# EAGLE board VarredorManual (EAGLE 3.55)
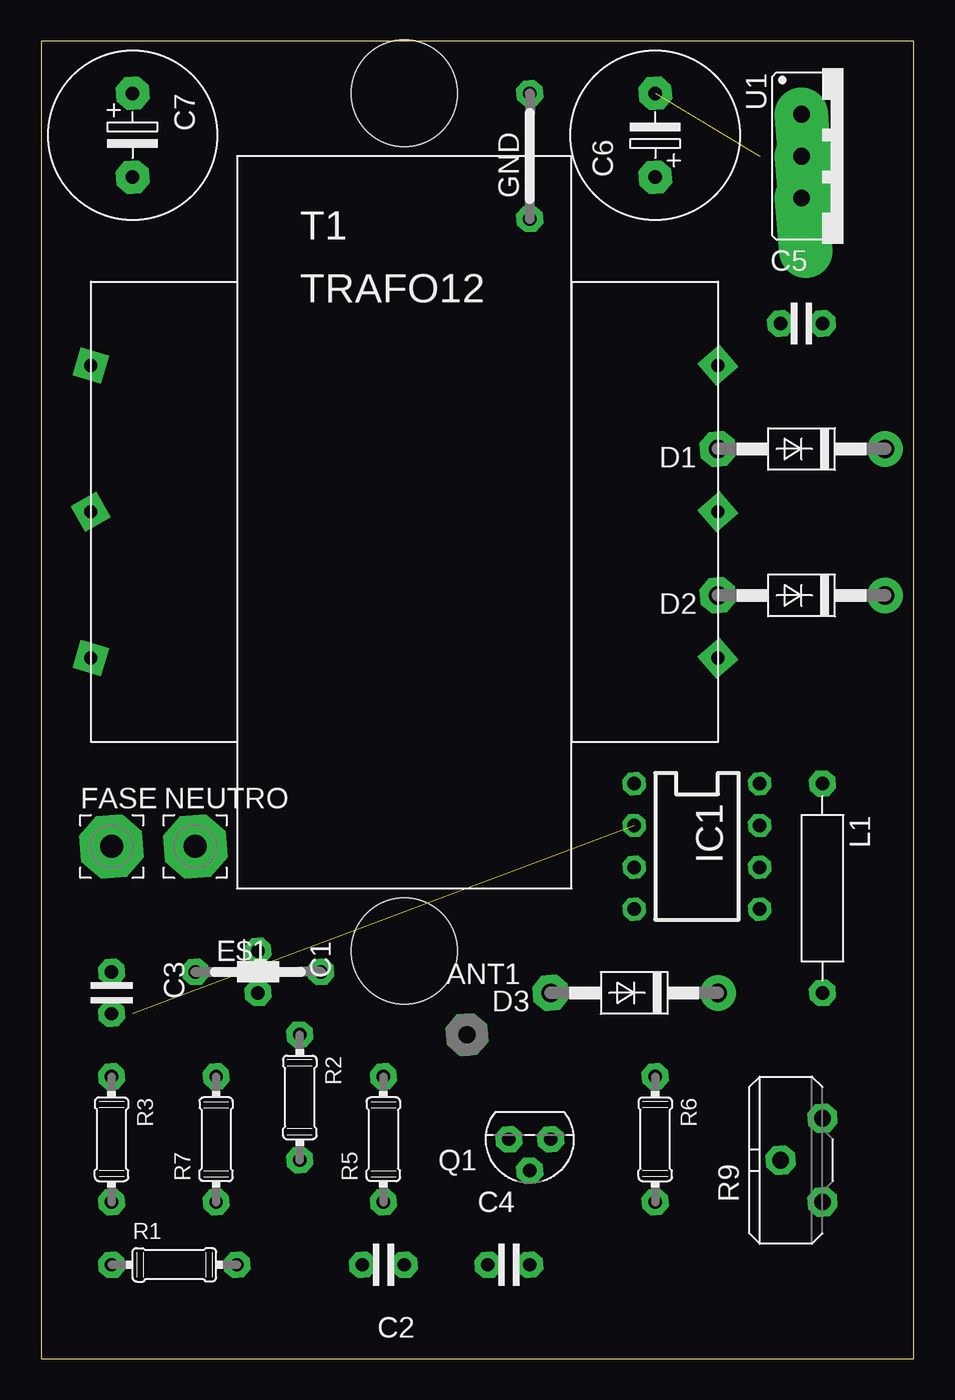
[diagram p0: board, top side]
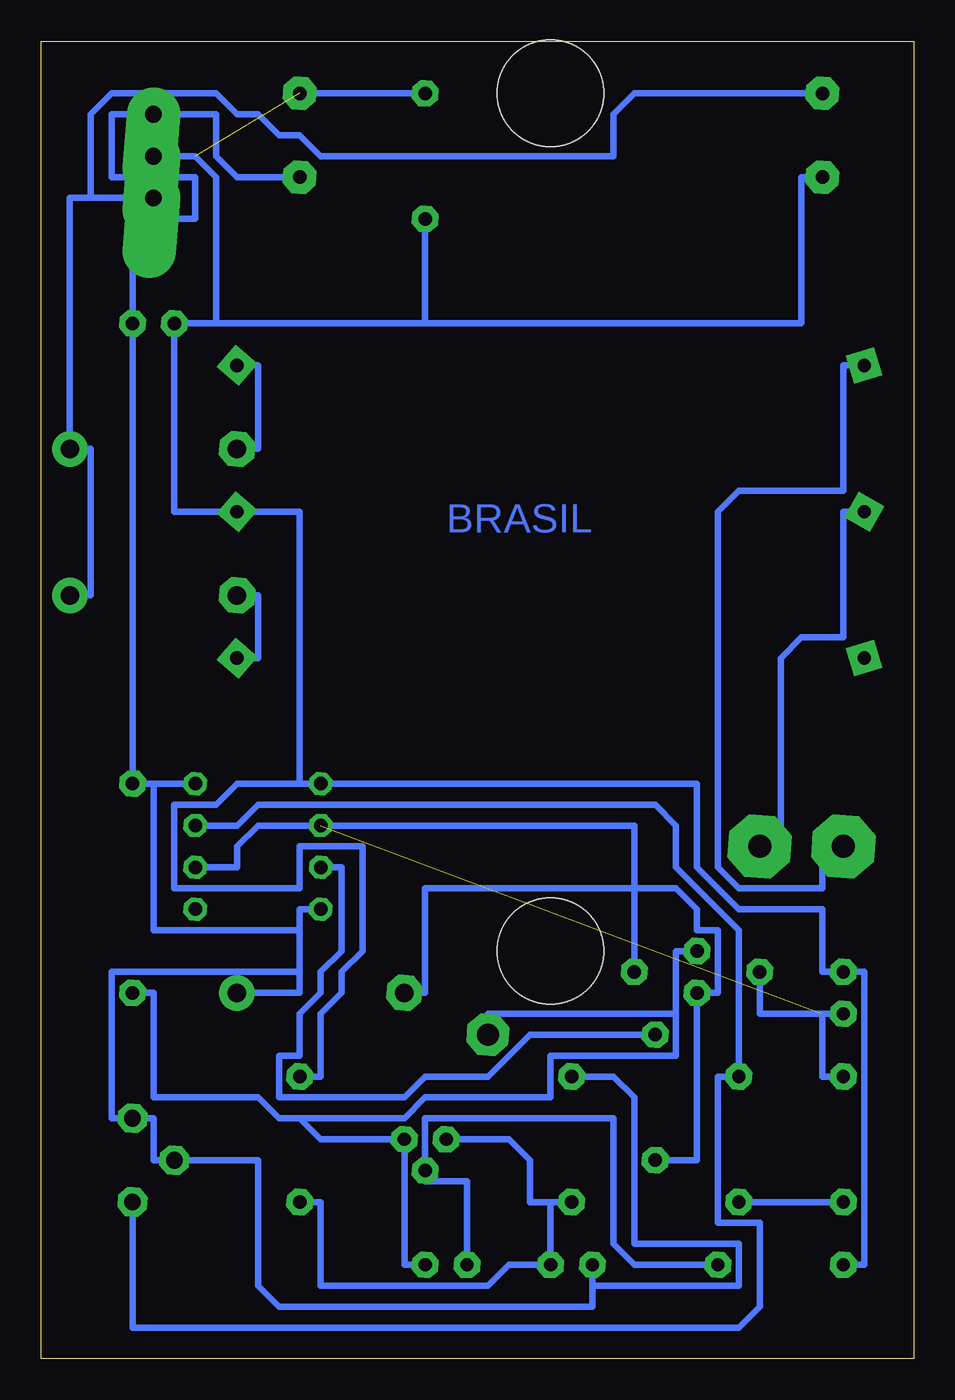
[diagram p1: board, bottom side, seen from below]

Size 53.01 x 80 mm. Coordinates in mm from the lower left corner, seen from the top.
Outline: 0,0 53.01,0 53.01,80 0,80 0,0
Copper layers used: Bottom

## Footprints (pad centres in the part's own frame; a part is rotated, then mirrored left to right if it is on the bottom)
D-01 = drill 1.321 pad 2.54 octagon:  0,0
2,5 = drill 0.813 pad 1.6 octagon:  -1.27,0;  1.27,0
-5 = drill 0.813 pad 2.007 octagon:  -2.54,0;  2.54,0
41-10 = drill 1.118 pad 2.159 octagon:  5.08,0 | drill 1.118 pad 2.159 round:  -5.08,0
 = drill 0.813 pad 1.6 octagon:  -3.81,0;  3.81,0
81/1,4 = drill 1.397 pad 3.81 octagon:  0,0
L8 = drill 0.813 pad 1.397 octagon:  -3.81,-3.81;  -1.27,-3.81;  1.27,-3.81;  3.81,-3.81;  3.81,3.81;  1.27,3.81;  -1.27,3.81;  -3.81,3.81
12,5 = drill 0.813 pad 1.6 octagon:  -6.35,0;  6.35,0
92 = drill 0.813 pad 1.6 octagon:  1.27,0;  0,1.905;  -1.27,0
04/7 = drill 0.813 pad 1.6 octagon:  -3.81,0;  3.81,0
-10S = drill 1.016 pad 1.778 octagon:  -2.54,-1.27;  2.54,-1.27;  0,1.27
AFO500 = drill 0.813 pad 1.778 square: 10 -19.05,8.89; 20 -19.05,-8.89; C-1 19.05,8.89; C-2 19.05,-8.89; RA -19.05,0;  19.05,0 | hole 6.452: 0,25.4; 0,-26.67
220S = drill 1.016 pad 3.251 offset:  -2.54,-2.54;  0,-2.54;  2.54,-2.54

## Placement (x,y rotation side)
ANT1  ANTENA  [D-01]  25.87,19.68 0 top
C1  1nf  [2,5]  13.17,23.49 270 top
C2  4,7pf  [2,5]  20.79,5.71 180 top
C3  47nf  [2,5]  4.28,22.22 270 top
C4  4,7pf  [2,5]  28.41,5.71 0 top
C5  100nf  [2,5]  46.19,62.86 0 top
C6  100uf  [-5]  37.3,74.29 90 top
C7  1000uF  [-5]  5.55,74.29 270 top
D1  1N4004  [41-10]  46.19,55.24 180 top
D2  1N4004  [41-10]  46.19,46.35 180 top
D3  BB809  [41-10]  36.03,22.22 180 top
E$1  []  13.17,23.49 0 top
FASE  [81/1,4]  4.28,31.11 0 top
GND  []  29.68,73.02 90 top
IC1  555  [L8]  39.84,31.11 270 top
L1  [12,5]  47.46,28.57 270 top
NEUTRO  [81/1,4]  9.36,31.11 0 top
Q1  BF494  [92]  29.68,13.33 180 top
R1  220  [04/7]  8.09,5.71 0 top
R2  220k  [04/7]  15.71,15.87 270 top
R3  4k7  [04/7]  4.28,13.33 270 top
R5  10K  [04/7]  20.79,13.33 90 top
R6  5,6K  [04/7]  37.3,13.33 270 top
R7  10k  [04/7]  10.63,13.33 90 top
R9  100k  [-10S]  46.19,12.06 90 top
T1  TRAFO12  [AFO500]  22.06,51.43 0 top
U1  7812T  [220S]  48.73,73.02 270 top

## Library data of the parts
ANT1 C1-C7 L1 R9 = discrete
D1-D3 = diode
E$1 GND = jumper
FASE NEUTRO = wirepad
IC1 = demo
Q1 = npn
R1-R3 R5-R7 = r
T1 = Analogic
U1 = v-reg

## Nets
AC220: T1.20
GND: C3. C5. C6. C7. GND. IC1. R1. R6. T1. U1.
N$1: D1. T1.C-1
N$2: D2. T1.C-2
N$3: C7. D1. D2. U1.
N$5: IC1. R7. R9.
N$6: C4. Q1. R1.
N$7: C2. Q1. R5. R6.
N$8: C1. D3. R2.
N$9: IC1. R2.
N$10: ANT1. C1. C4. L1. Q1.
N$12: R3. R7.
N$13: FASE. T1.10
N$14: C3. E$1. IC1. R3.
N$15: NEUTRO. T1.RA
V+: C2. C5. C6. D3. IC1. L1. R5. R9. U1.

## Tracks (layer width: path | path; a pad name or v marks a point on that pad's centre or on a via)
GND  (1 unrouted)
  Bottom 0.406: 4.28,5.71 3.01,5.71 3.01,23.49 4.28,23.49 5.55,23.49 5.55,27.3 10.63,27.3 13.17,29.84 13.17,34.92 36.03,34.92 37.3,34.92 | 37.3,34.92 37.3,51.43 T1. 44.92,51.43 44.92,62.86 42.38,62.86 | 37.3,17.14 36.03,17.14 36.03,20.95 34.76,22.22 34.76,23.49 33.49,24.76 33.49,31.11 37.3,31.11 37.3,28.57 44.92,28.57 44.92,33.65 42.38,33.65 41.11,34.92 37.3,34.92 | C7. 6.82,71.75 6.82,62.86 29.68,62.86 | 42.38,62.86 29.68,62.86 | 42.38,62.86 42.38,71.75 43.65,73.02 46.19,73.02 | GND. C6. | 29.68,69.21 29.68,62.86
N$1
  Bottom 0.406: T1.C-1 39.84,60.32 39.84,55.24 41.11,55.24
N$2
  Bottom 0.406: T1.C-2 39.84,42.54 39.84,46.35 41.11,46.35
N$3
  Bottom 0.406: D2. 50,46.35 50,55.24 D1. 51.27,70.48 50,70.48 | 5.55,76.83 16.98,76.83 18.25,75.56 18.25,73.02 36.03,73.02 37.3,74.29 38.57,74.29 39.84,75.56 41.11,75.56 42.38,76.83 48.73,76.83 50,75.56 50,70.48 | 50,70.48 U1.
N$5
  Bottom 0.406: 43.65,32.38 41.11,32.38 39.84,33.65 15.71,33.65 14.44,32.38 14.44,29.84 10.63,26.03 R7. 11.9,17.14 11.9,8.25 9.36,8.25 9.36,3.17 10.63,1.9 47.46,1.9 47.46,9.52
N$6
  Bottom 0.406: R1. 16.98,5.71 18.25,6.98 18.25,14.6 29.68,14.6 29.68,11.43 29.68,10.79 27.14,10.79 27.14,5.71
N$7
  Bottom 0.406: 22.06,9.52 22.06,5.71 24.6,5.71 25.87,4.44 36.03,4.44 36.03,9.52 R6. | 22.06,9.52 20.79,9.52 | 28.41,13.33 24.6,13.33 23.33,12.06 23.33,9.52 22.06,9.52
N$8
  Bottom 0.406: R2. 13.17,12.06 C1. 11.9,22.22 11.9,26.03 13.17,26.03 13.17,27.3 14.44,28.57 29.68,28.57 29.68,22.22 30.95,22.22
N$9
  Bottom 0.406: 36.03,29.84 34.76,29.84 34.76,24.76 36.03,23.49 36.03,22.22 37.3,20.95 37.3,18.41 38.57,18.41 38.57,15.87 30.95,15.87 29.68,17.14 25.87,17.14 23.33,19.68 15.71,19.68
N$10
  Bottom 0.406: 13.17,24.76 14.44,24.76 14.44,20.95 | 14.44,20.95 25.87,20.95 ANT1. | C4. 30.95,5.71 Q1. 36.03,13.33 37.3,14.6 | L1. 46.19,22.22 46.19,15.87 39.84,15.87 38.57,14.6 37.3,14.6 | 14.44,20.95 14.44,18.41 22.06,18.41 22.06,15.87 29.68,15.87 30.95,14.6 37.3,14.6
N$12
  Bottom 0.406: R3. 10.63,9.52
N$13
  Bottom 0.406: T1.10 4.28,60.32 4.28,52.7 10.63,52.7 11.9,51.43 11.9,29.84 10.63,28.57 5.55,28.57 5.55,29.84 FASE.
N$14  (1 unrouted)
  Bottom 0.406: 43.65,29.84 41.11,29.84 41.11,31.11 39.84,32.38 36.03,32.38 16.98,32.38 E$1. | 4.28,17.14 5.55,17.14 5.55,20.95 | 5.55,20.95 C3. | 5.55,20.95 9.36,20.95 9.36,23.49
N$15
  Bottom 0.406: T1.RA 4.28,51.43 4.28,43.81 6.82,43.81 8.09,42.54 8.09,32.38 NEUTRO.
V+
  Bottom 0.406: 37.3,71.75 41.11,71.75 42.38,73.02 42.38,75.56 46.19,75.56 48.73,75.56 48.73,71.75 43.65,71.75 43.65,69.21 47.46,69.21 C5. 47.46,34.92 46.19,34.92 | 46.19,34.92 IC1. | 36.03,27.3 37.3,27.3 37.3,26.03 | 37.3,23.49 37.3,22.22 D3. | 37.3,23.49 37.3,26.03 | 46.19,34.92 46.19,26.03 37.3,26.03 | 19.52,4.44 19.52,3.17 38.57,3.17 39.84,4.44 39.84,12.06 R9. 46.19,12.06 46.19,14.6 47.46,14.6 48.73,14.6 48.73,23.49 37.3,23.49 | 19.52,4.44 C2. | R5. 18.25,17.14 16.98,15.87 16.98,6.98 10.63,6.98 10.63,4.44 19.52,4.44

## Text on the board
Bottom: BRASIL